# Allegro board Flatburn-sensor-board-PCB.brd
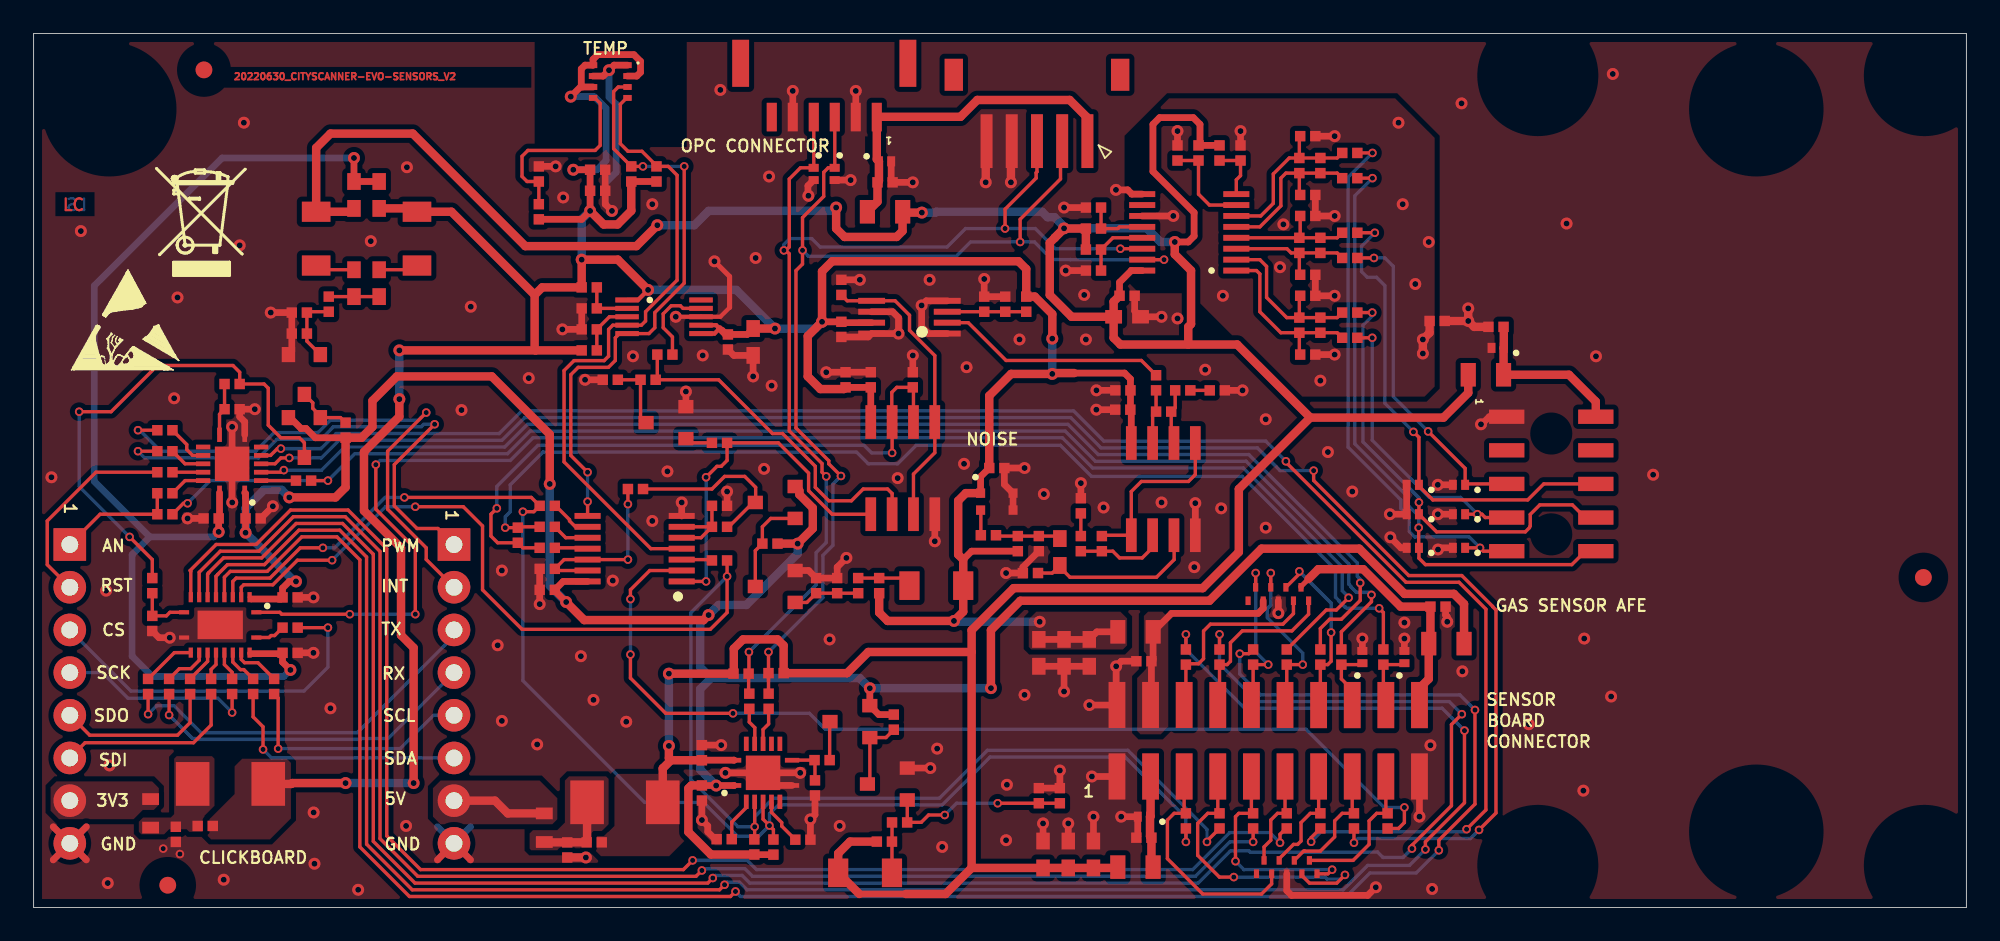
[diagram p0: board, top side]
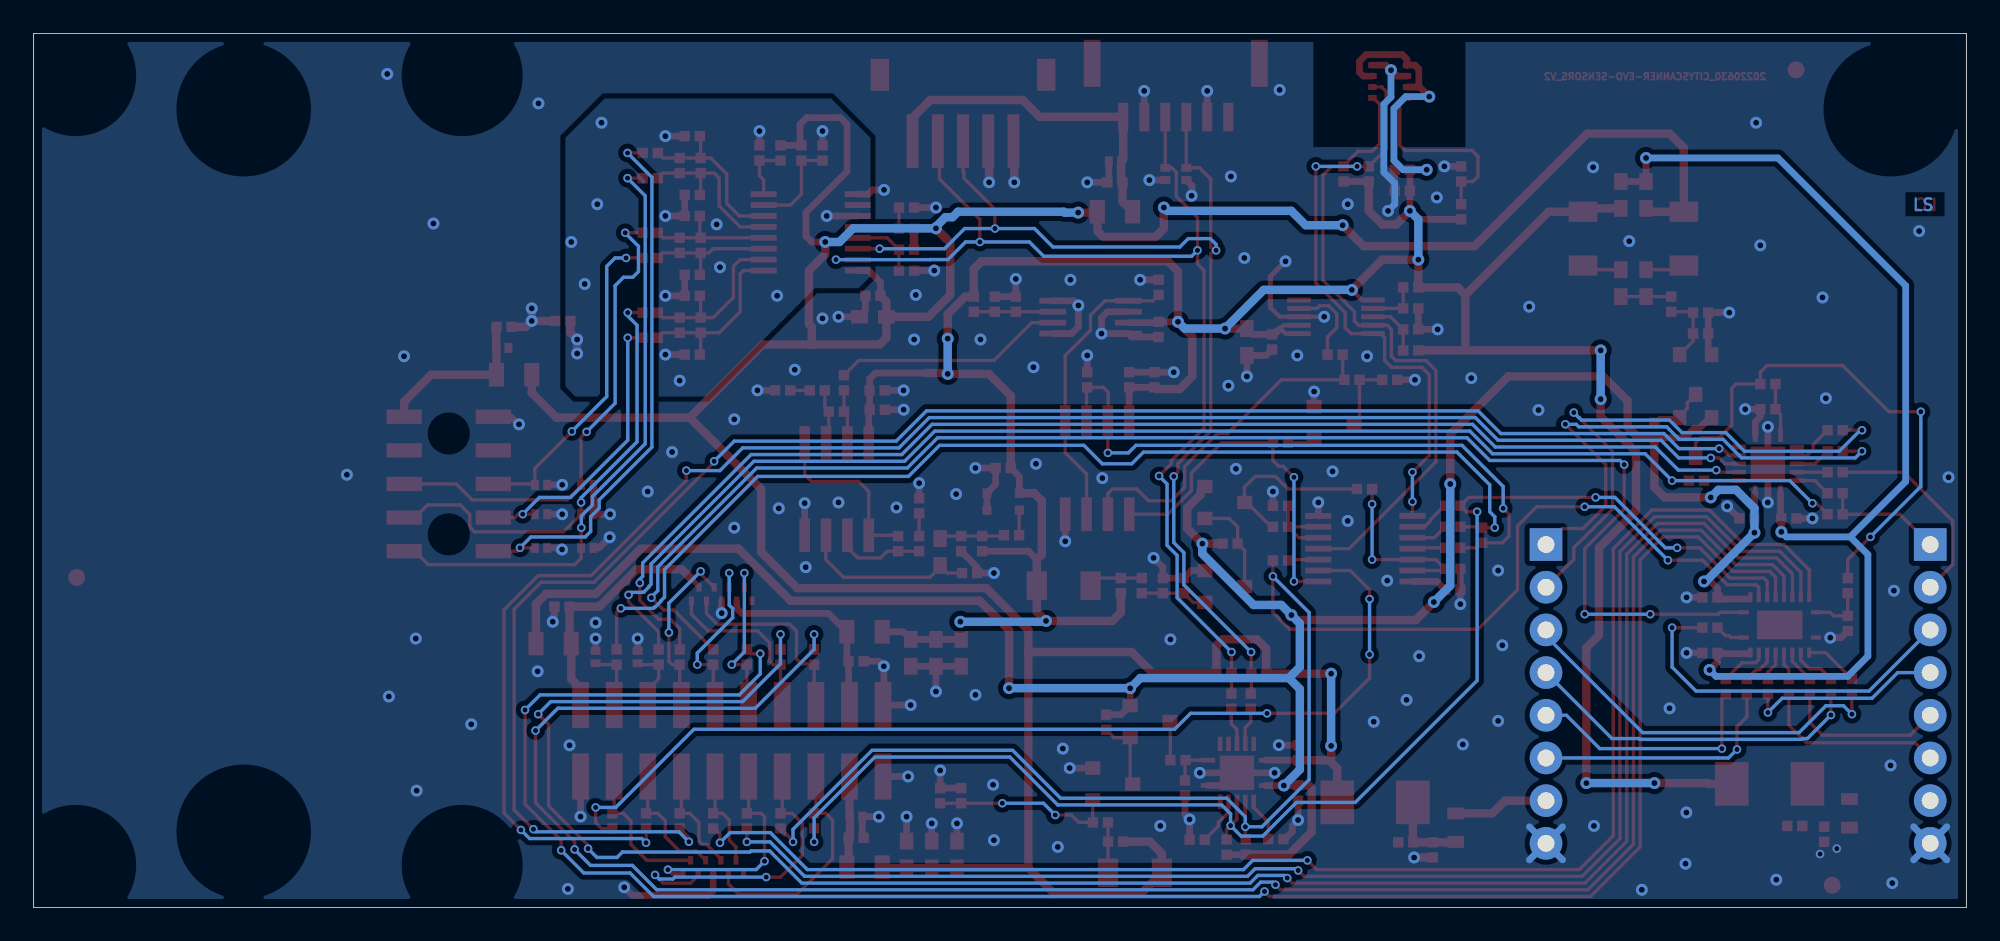
[diagram p1: board, bottom side, seen from below]

Outline 115 x 52 mm; copper layers: TOP, BOTTOM. Coordinates in mm from the lower left corner of the outline.
Outline path: 0,52 0,0 115,0 115,52 0,52

## Design rules (mm)
constraint set DEFAULT: 

## Placement (name value [footprint] x y rotation side)
C9  100n/50V  [CS-C-0402]  83.56 17.9 0 top
C10  100n/50V  [CS-C-0402]  66.06 14.65 180 top
C11  100n/50V  [CS-C-0402]  66.06 4.15 180 top
C14  NU  [CS-C-0402]  15.81 35.4 0 top
C15  100n/50V  [CS-C-0402]  15.26 18.45 0 top
C16  100n/50V  [CS-C-0402]  15.26 15.15 0 top
C17  100n/50V  [CS-C-0402]  13.06 23.15 0 top
C18  100n/50V  [CS-C-0402]  10.56 23.15 180 top
C19  100n/50V  [CS-C-0402]  8.46 4.35 90 top
C20  100n/50V  [CS-C-0402]  31.75 3.42 270 top
C21  10u/10V-X5R  [CS-C-0603]  62.81 15.15 270 top
C22  10u/10V-X5R  [CS-C-0603]  61.31 15.15 270 top
C23  10u/10V-X5R  [CS-C-0603]  59.81 15.15 270 top
C24  10u/10V-X5R  [CS-C-0603]  63.06 3.15 90 top
C25  10u/10V-X5R  [CS-C-0603]  61.56 3.15 90 top
C26  10u/10V-X5R  [CS-C-0603]  60.06 3.15 90 top
C27  100n/50V  [CS-C-0402]  39.76 6.81 270 top
C28  100n/50V  [CS-C-0402]  39.76 9.21 90 top
C99  100n/50V  [CS-C-0402]  30.56 18.9 180 top
C100  NU  [CS-C-0402]  61.06 6.65 270 top
C101  NU  [CS-C-0402]  47.81 19.15 270 top
C102  100n/50V  [CS-C-0402]  33.56 42.65 0 top
C103  100n/50V  [CS-C-0402]  33.56 43.9 0 top
C104  100n/50V  [CS-C-0402]  87.01 34.55 180 top
C105  100n/50V  [CS-C-0402]  65.06 36.4 0 top
C106  100n/50V  [CS-C-0402]  50.66 43.15 0 top
C107  10u/10V-X5R  [CS-C-0603]  65.06 35.15 0 top
C108  100n/50V  [CS-C-0402]  76.56 34.65 270 top
C109  100n/50V  [CS-C-0402]  76.56 39.4 270 top
C110  100n/50V  [CS-C-0402]  75.81 32.9 0 top
C111  100n/50V  [CS-C-0402]  76.56 44.15 270 top
C112  100n/50V  [CS-C-0402]  75.81 37.65 0 top
C113  100n/50V  [CS-C-0402]  75.81 36.4 0 top
C114  100n/50V  [CS-C-0402]  75.81 41.15 0 top
C115  100n/50V  [CS-C-0402]  75.81 42.4 0 top
C116  100n/50V  [CS-C-0402]  75.81 45.9 0 top
C117  100n/50V  [CS-C-0402]  57.31 26.15 0 top
C121  1u/16V-X5R  [CS-C-0402]  59.31 19.9 180 top
C122  1u/16V-X5R  [CS-C-0402]  56.81 22.15 0 top
C123  100n/50V  [CS-C-0402]  48.06 34.4 270 top
C124  100n/50V  [CS-C-0402]  48.06 36.9 90 top
C125  100n/50V  [CS-C-0402]  56.56 35.9 90 top
C126  100n/50V  [CS-C-0402]  64.8 29.62 180 top
C127  1u/16V-X5R  [CS-C-0402]  64.81 30.77 0 top
C128  100n/50V  [CS-C-0402]  62.31 23.9 90 top
C129  100n/50V  [CS-C-0402]  70.43 30.77 0 top
C130  100n/50V  [CS-C-0402]  49.81 31.4 90 top
C131  1u/16V-X5R  [CS-C-0402]  48.31 31.4 270 top
C132  100n/50V  [CS-C-0402]  52.31 31.4 90 top
C133  100n/50V  [CS-C-0402]  41.31 33.65 270 top
C134  10u/10V-X5R  [CS-C-0603]  42.81 33.65 270 top
DS5  NU  [SMA]  9.46 7.35 0 top
DS6  NU  [SMA]  32.93 6.25 0 top
DZ3  MMSZ5226BT1G  [SOD123]  16.81 41.4 270 top
DZ4  MMSZ5221BT1G  [SOD123]  22.81 41.4 270 top
DZ5  MMSZ5226BT1G  [SOD123]  47.87 2.06 0 top
DZ7  MMSZ5221BT1G  [SOD123]  55.31 19.15 180 top
F2  0ZCM0020FF2G  [FS-0603]  6.96 5.6 270 top
F3  0ZCM0020FF2G  [FS-0603]  30.39 4.74 90 top
FID1  TPS  [FIDUCIAL]  10.13 49.84 0 top
FID2  TPS  [FIDUCIAL]  7.98 1.32 0 top
FID3  TPS  [FIDUCIAL]  112.44 19.63 0 top
J7  878322014  [J-10X2-0200-MDS-878322014]  64.46 7.79 0 top
J9  STRIP 8P - FDT  [J-8-0254-FDT]  2.15 12.7 270 top
J10  STRIP 8P - FDT  [J-8-0254-FDT]  25.01 12.7 270 top
J11  BF100-10-A-D-1-0640-L-C  [J-5X2-0200-FDS-BF100]  90.3 25.2 270 top
J12  SM06B-GHS-TB  [J-6-0125-MOS-SM06B-GHS-TB]  50.17 47.03 180 top
J13  S5B-ZR-SM4A-TF  [J-5-0150-MOS-S5B-ZR-SM4A]  59.7 47.2 0 top
L3  BLM21PG221SN1D  [LS-0805]  84.06 15.7 180 top
L5  BLM21PG221SN1D  [LS-0805]  65.56 16.4 0 top
L6  BLM21PG221SN1D  [LS-0805]  65.56 2.4 180 top
L7  BLM21PG221SN1D  [LS-0805]  50.66 41.4 0 top
L8  BLM21PG221SN1D  [LS-0805]  86.41 31.7 0 top
NOREF  -  []  70.87 5.29 90 top
NOREF#2  -  []  42.88 3.15 90 top
NOREF#3  -  []  82.19 21.7 0 top
NOREF#4  -  []  68.87 5.29 90 top
NOREF#5  -  []  48.26 43.35 90 top
NOREF#6  -  []  37.06 43.2 90 top
NOREF#7  -  []  67.06 15.7 90 top
NOREF#8  -  []  46.18 7.87 0 top
NOREF#9  -  []  77.55 43.71 0 top
NOREF#10  -  []  69.62 45.04 90 top
NOREF#11  -  []  15.67 33.84 90 top
NOREF#12  -  []  59.06 35.45 90 top
NOREF#13  -  []  48.37 37.04 90 top
NOREF#14  -  []  77.55 38.96 0 top
NOREF#15  -  []  68.56 4.7 90 top
NOREF#16  -  []  67.61 31.08 0 top
NOREF#17  -  []  42.81 32.85 90 top
NOREF#18  -  []  29.89 5.24 0 top
NOREF#19  -  []  6.75 17.66 0 top
NOREF#20  -  []  15.36 34.15 0 top
NOREF#21  -  []  61.06 4.35 0 top
NOREF#22  -  []  62.31 14.75 0 top
NOREF#23  -  []  35.31 35.15 90 top
NOREF#24  -  []  21.06 41.2 90 top
NOREF#25  -  []  7.75 13.01 0 top
NOREF#26  -  []  12.75 13.01 0 top
NOREF#27  -  []  75.36 37.65 0 top
NOREF#28  -  []  15.3 25.71 0 top
NOREF#29  -  []  40.67 23.59 90 top
NOREF#30  -  []  76.25 15.66 0 top
NOREF#31  -  []  50.47 2.91 0 top
NOREF#32  -  []  64.61 36.4 0 top
NOREF#33  -  []  8.95 16.06 0 top
NOREF#34  -  []  29.75 43.51 0 top
NOREF#35  -  []  3 47.5 0 top
NOREF#36  -  []  45.81 43.35 0 top
NOREF#37  -  []  58.07 25.84 90 top
NOREF#38  -  []  47.06 43.35 0 top
NOREF#39  -  []  75.95 36.71 0 top
NOREF#40  -  []  49.81 23.4 0 top
NOREF#41  -  []  60.12 21.79 90 top
NOREF#42  -  []  83.01 15.7 0 top
NOREF#43  -  []  47.79 43.95 0 top
NOREF#44  -  []  62.61 40.4 0 top
NOREF#45  -  []  59.56 4.35 0 top
NOREF#46  -  []  58.86 19.9 0 top
NOREF#47  -  []  14.96 6.05 90 top
NOREF#48  -  []  7.05 27.46 0 top
NOREF#49  -  []  65.61 14.65 0 top
NOREF#50  -  []  76.56 34.2 90 top
NOREF#51  -  []  62.3 40.71 0 top
NOREF#52  -  []  39.76 6.36 90 top
NOREF#53  -  []  40.05 24.21 0 top
NOREF#54  -  []  40.05 20.96 0 top
NOREF#55  -  []  61.56 2.35 90 top
NOREF#56  -  []  15.66 30.13 90 top
NOREF#57  -  []  65.92 3.84 90 top
NOREF#58  -  []  36.11 31.4 0 top
NOREF#59  -  []  50.21 43.15 0 top
NOREF#60  -  []  65.92 14.34 90 top
NOREF#61  -  []  35.05 25.21 0 top
NOREF#62  -  []  30.42 21.09 90 top
NOREF#63  -  []  62.61 41.65 0 top
NOREF#64  -  []  12.12 12.39 90 top
NOREF#65  -  []  11.81 12.7 90 top
NOREF#66  -  []  65.31 22.15 0 top
NOREF#67  -  []  52.62 31.54 90 top
NOREF#68  -  []  42.89 12.41 90 top
NOREF#69  -  []  83.11 17.9 0 top
NOREF#70  -  []  77.86 44.9 0 top
NOREF#71  -  []  47.05 9.07 0 top
NOREF#72  -  []  61.56 19.95 90 top
NOREF#73  -  []  76.56 4.7 90 top
NOREF#74  -  []  20.06 42 0 top
NOREF#75  -  []  7.36 25.9 0 top
NOREF#76  -  [unnamed#2]  112.5 2.5 0 top
NOREF#77  -  []  59.81 6.2 90 top
NOREF#78  -  []  38.43 4.95 90 top
NOREF#79  -  []  78.56 4.7 90 top
NOREF#80  -  []  74.87 5.29 90 top
NOREF#81  -  []  52.16 40.7 90 top
NOREF#82  -  []  19.06 36.35 90 top
NOREF#83  -  []  15.95 35.71 0 top
NOREF#84  -  []  48.31 30.95 90 top
NOREF#85  -  []  43.36 21.65 0 top
NOREF#86  -  []  59.11 18.3 90 top
NOREF#87  -  []  44.32 14.25 0 top
NOREF#88  -  []  31.75 2.97 90 top
NOREF#89  -  []  80.62 15.04 90 top
NOREF#90  -  []  50.06 44.1 0 top
NOREF#91  -  []  65.3 4.46 0 top
NOREF#92  -  []  42.26 6.71 90 top
NOREF#93  -  []  9.8 23.46 0 top
NOREF#94  -  []  7.37 19.29 90 top
NOREF#95  -  []  49.06 34.32 0 top
NOREF#96  -  []  44.86 25.45 0 top
NOREF#97  -  []  71.56 37.9 90 top
NOREF#98  -  []  49.86 36.1 0 top
NOREF#99  -  []  74.87 15.04 90 top
NOREF#100  -  []  66.79 30.77 90 top
NOREF#101  -  []  76.87 33.89 90 top
NOREF#102  -  []  33.04 48 0 top
NOREF#103  -  []  43.42 13.03 0 top
NOREF#104  -  []  32.92 36.59 90 top
NOREF#105  -  []  14.71 29.55 0 top
NOREF#106  -  []  32.79 18.62 90 top
NOREF#107  -  []  74.25 15.66 0 top
NOREF#108  -  []  35.25 43.51 0 top
NOREF#109  -  []  115 0 90 top
NOREF#110  -  []  32.59 4.18 0 top
NOREF#111  -  []  87.24 33.6 0 top
NOREF#112  -  []  72.56 14.45 90 top
NOREF#113  -  []  60.81 15.55 90 top
NOREF#114  -  []  13.2 23.46 0 top
NOREF#115  -  []  70.56 4.7 90 top
NOREF#116  -  []  42.26 5.86 0 top
NOREF#117  -  []  76.57 45.59 90 top
NOREF#118  -  []  35.07 31.09 90 top
NOREF#119  -  []  62.56 1.95 90 top
NOREF#120  -  []  83.46 15 90 top
NOREF#121  -  []  64.26 35.15 0 top
NOREF#122  -  []  11.67 29.34 90 top
NOREF#123  -  []  63.06 2.35 90 top
NOREF#124  -  []  9.46 7.35 0 top
NOREF#125  -  []  112.5 -1.1 90 top
NOREF#126  -  []  72.25 5.91 0 top
NOREF#127  -  []  70.25 45.66 0 top
NOREF#128  -  []  17.25 36.66 0 top
NOREF#129  -  []  42.58 11.82 90 top
NOREF#130  -  []  51.98 6.39 90 top
NOREF#131  -  []  7.36 24.65 0 top
NOREF#132  -  []  42.49 23.7 90 top
NOREF#133  -  []  36.43 7.55 0 top
NOREF#134  -  []  33.7 42.96 0 top
NOREF#135  -  []  63.87 21.79 90 top
NOREF#136  -  []  112.5 48.2 90 top
NOREF#137  -  []  19.56 35.95 90 top
NOREF#138  -  []  76.87 15.04 90 top
NOREF#139  -  []  89.5 1.2 90 top
NOREF#140  -  []  112.5 1.2 90 top
NOREF#141  -  []  32.9 3.87 0 top
NOREF#142  -  []  7.36 28.4 0 top
NOREF#143  -  []  14.31 12.7 90 top
NOREF#144  -  []  15.4 18.76 0 top
NOREF#145  -  []  32.92 32.84 90 top
NOREF#146  -  []  67.92 30.77 0 top
NOREF#147  -  []  68 29.19 90 top
NOREF#148  -  []  13.82 22.84 90 top
NOREF#149  -  []  33.82 35.34 90 top
NOREF#150  -  []  65.96 42.45 0 top
NOREF#151  -  []  12.35 18.46 0 top
NOREF#152  -  []  82.75 35.21 0 top
NOREF#153  -  []  53.62 23.4 90 top
NOREF#154  -  []  15.16 32.9 0 top
NOREF#155  -  []  14.81 15.15 0 top
NOREF#156  -  []  14.62 12.39 90 top
NOREF#157  -  []  10.16 41.35 0 top
NOREF#158  -  []  84.21 24.85 0 top
NOREF#159  -  []  64.95 31.08 0 top
NOREF#160  -  []  16.11 26.78 0 top
NOREF#161  -  []  42.94 19.1 0 top
NOREF#162  -  []  75.95 41.46 0 top
NOREF#163  -  []  78.17 33.59 90 top
NOREF#164  -  []  62.92 38.84 90 top
NOREF#165  -  []  77.55 35.71 0 top
NOREF#166  -  []  74.56 4.7 90 top
NOREF#167  -  []  19.41 42.25 0 top
NOREF#168  -  []  80 15.66 0 top
NOREF#169  -  []  59.81 21.2 90 top
NOREF#170  -  []  29.8 21.71 0 top
NOREF#171  -  []  64.35 29.62 0 top
NOREF#172  -  []  42.27 13.03 0 top
NOREF#173  -  []  64.96 1.7 90 top
NOREF#174  -  []  76.57 32.59 90 top
NOREF#175  -  []  62.62 20.89 90 top
NOREF#176  -  []  47.5 19.01 0 top
NOREF#177  -  []  47.81 18.7 90 top
NOREF#178  -  []  62 21.51 0 top
NOREF#179  -  []  47.39 11.06 0 top
NOREF#180  -  []  40.67 22.34 90 top
NOREF#181  -  []  31.59 4.24 90 top
NOREF#182  -  []  84.94 21.7 0 top
NOREF#183  -  []  10.67 24.25 0 top
NOREF#184  -  []  76.57 36.09 90 top
NOREF#185  -  []  8.06 12.7 90 top
NOREF#186  -  []  41.23 4.37 0 top
NOREF#187  -  []  41.62 32.89 90 top
NOREF#188  -  []  40.07 6.05 90 top
NOREF#189  -  []  13.37 12.39 90 top
NOREF#190  -  []  85.41 21.1 90 top
NOREF#191  -  []  56.25 36.66 0 top
NOREF#192  -  []  76.56 43.7 90 top
NOREF#193  -  []  79.66 14.6 90 top
NOREF#194  -  []  77.86 38.65 0 top
NOREF#195  -  []  11.5 13.01 0 top
NOREF#196  -  []  112.5 45.9 90 top
NOREF#197  -  []  15.16 29.15 0 top
NOREF#198  -  []  7.36 23.4 0 top
NOREF#199  -  []  32.3 33.46 0 top
NOREF#200  -  []  83.7 18.21 0 top
NOREF#201  -  []  80.25 5.91 0 top
NOREF#202  -  []  17.87 36.04 90 top
NOREF#203  -  []  40.36 27.65 0 top
NOREF#204  -  []  32.61 35.65 0 top
NOREF#205  -  []  78.17 38.34 90 top
NOREF#206  -  []  38.32 32.59 90 top
NOREF#207  -  []  78.12 15.04 90 top
NOREF#208  -  []  44.86 20.45 0 top
NOREF#209  -  []  61.06 20.35 90 top
NOREF#210  -  []  49.81 30.95 90 top
NOREF#211  -  []  7.67 25.59 90 top
NOREF#212  -  []  67.38 29.81 0 top
NOREF#213  -  []  32.61 33.15 0 top
NOREF#214  -  []  87.65 21.2 90 top
NOREF#215  -  []  38.56 19.4 90 top
NOREF#216  -  []  85.41 24.85 90 top
NOREF#217  -  [unnamed#2]  89.5 2.5 0 top
NOREF#218  -  []  75.36 36.4 0 top
NOREF#219  -  []  72.87 5.29 90 top
NOREF#220  -  []  65.82 36.09 90 top
NOREF#221  -  []  62.62 24.04 90 top
NOREF#222  -  []  20.06 36.75 0 top
NOREF#223  -  []  50.77 5.36 0 top
NOREF#224  -  []  62.56 4.35 0 top
NOREF#225  -  []  29.75 41.26 0 top
NOREF#226  -  []  14.81 16.65 0 top
NOREF#227  -  []  45.63 3.72 90 top
NOREF#228  -  []  68.25 15.66 0 top
NOREF#229  -  []  46.46 8.77 0 top
NOREF#230  -  []  34.32 42.34 90 top
NOREF#231  -  []  25.41 42.25 0 top
NOREF#232  -  [unnamed#3]  102.5 47.5 0 top
NOREF#233  -  []  28.5 22.01 0 top
NOREF#234  -  []  8.16 5.1 90 top
NOREF#235  -  []  72.56 4.7 90 top
NOREF#236  -  []  51.26 44.1 90 top
NOREF#237  -  []  62.31 21.2 90 top
NOREF#238  -  []  77.81 14.45 90 top
NOREF#239  -  []  76.56 38.95 90 top
NOREF#240  -  []  84.94 25.45 0 top
NOREF#241  -  []  7.06 16.45 90 top
NOREF#242  -  []  15.61 25.4 0 top
NOREF#243  -  []  11.05 29.96 0 top
NOREF#244  -  []  62 24.66 0 top
NOREF#245  -  []  62.61 39.15 0 top
NOREF#246  -  []  34.32 43.59 90 top
NOREF#247  -  []  30.11 22.65 0 top
NOREF#248  -  []  50.12 31.54 90 top
NOREF#249  -  []  62.81 14.35 90 top
NOREF#250  -  []  41.85 3.75 90 top
NOREF#251  -  []  80.31 14.45 90 top
NOREF#252  -  []  30.7 24.21 0 top
NOREF#253  -  []  11.36 29.65 0 top
NOREF#254  -  []  75.62 44.29 90 top
NOREF#255  -  []  65.46 5.1 0 top
NOREF#256  -  []  64.51 16.4 0 top
NOREF#257  -  []  39.76 8.76 90 top
NOREF#258  -  []  6.46 6.1 0 top
NOREF#259  -  []  10.11 23.15 0 top
NOREF#260  -  []  37.7 33.21 0 top
NOREF#261  -  []  56.86 26.15 0 top
NOREF#262  -  []  72.25 15.66 0 top
NOREF#263  -  []  86.87 34.24 90 top
NOREF#264  -  []  75.95 46.21 0 top
NOREF#265  -  []  64.36 30.77 0 top
NOREF#266  -  []  44.43 6.98 90 top
NOREF#267  -  []  64.66 29.31 90 top
NOREF#268  -  []  56.36 22.15 0 top
NOREF#269  -  []  39.45 9.97 0 top
NOREF#270  -  []  31.44 3.28 0 top
NOREF#271  -  []  39.45 6.67 0 top
NOREF#272  -  []  80.56 4.7 90 top
NOREF#273  -  []  50.31 18.7 90 top
NOREF#274  -  []  10.25 18.16 0 top
NOREF#275  -  []  33.82 34.09 90 top
NOREF#276  -  []  65.61 4.15 0 top
NOREF#277  -  []  64.06 1.7 0 top
NOREF#278  -  []  68.06 44.45 90 top
NOREF#279  -  []  19.56 41.2 90 top
NOREF#280  -  []  16.02 14.84 90 top
NOREF#281  -  []  75.95 37.96 0 top
NOREF#282  -  []  84.32 17.59 90 top
NOREF#283  -  []  30.11 18.9 0 top
NOREF#284  -  []  9.31 12.7 90 top
NOREF#285  -  []  57.45 26.46 0 top
NOREF#286  -  []  57.57 21.84 90 top
NOREF#287  -  []  43.71 3.45 0 top
NOREF#288  -  []  85.36 31.7 0 top
NOREF#289  -  []  70.56 14.45 90 top
NOREF#290  -  [unnamed#3]  102.5 4.5 0 top
NOREF#291  -  []  87.91 31 90 top
NOREF#292  -  []  76.87 5.29 90 top
NOREF#293  -  []  63.2 38.21 0 top
NOREF#294  -  []  35.36 24.9 0 top
NOREF#295  -  []  38.81 27.9 90 top
NOREF#296  -  []  14.71 33.3 0 top
NOREF#297  -  []  7.67 23.09 90 top
NOREF#298  -  []  70.56 44.45 90 top
NOREF#299  -  []  35.67 24.59 90 top
NOREF#300  -  []  41.95 13.6 90 top
NOREF#301  -  []  7.67 26.84 90 top
NOREF#302  -  []  12.56 24.67 90 top
NOREF#303  -  []  46.94 10.66 90 top
NOREF#304  -  []  18.87 27.64 90 top
NOREF#305  -  []  78.17 43.09 90 top
NOREF#306  -  []  44.57 21.34 90 top
NOREF#307  -  []  31.32 23.59 90 top
NOREF#308  -  []  76.25 34.51 0 top
NOREF#309  -  []  87.22 26.15 0 top
NOREF#310  -  []  58.12 35.14 90 top
NOREF#311  -  []  71.39 41.67 0 top
NOREF#312  -  []  9.15 18.69 0 top
NOREF#313  -  []  32.93 6.25 0 top
NOREF#314  -  []  50.48 3.6 90 top
NOREF#315  -  []  30.11 21.4 0 top
NOREF#316  -  []  57.81 35.45 90 top
NOREF#317  -  []  33.54 48 0 top
NOREF#318  -  []  58.55 20.21 0 top
NOREF#319  -  []  59.56 1.95 90 top
NOREF#320  -  []  65.79 37.12 90 top
NOREF#321  -  []  66.48 31.98 0 top
NOREF#322  -  []  12.95 25.1 90 top
NOREF#323  -  []  86.51 33 0 top
NOREF#324  -  []  32.3 37.21 0 top
NOREF#325  -  []  49.37 19.29 90 top
NOREF#326  -  []  49.61 7.34 0 top
NOREF#327  -  []  29.8 19.21 0 top
NOREF#328  -  []  18.56 42 0 top
NOREF#329  -  []  59.31 15.55 90 top
NOREF#330  -  []  47.67 8.46 90 top
NOREF#331  -  []  68.37 44.14 90 top
NOREF#332  -  []  79.19 15.2 0 top
NOREF#333  -  []  75.36 32.9 0 top
NOREF#334  -  []  52.11 19.15 0 top
NOREF#335  -  []  58.56 21.2 90 top
NOREF#336  -  []  8.46 3.9 90 top
NOREF#337  -  []  20.56 36.35 90 top
NOREF#338  -  []  8.15 5.11 0 top
NOREF#339  -  []  89.5 -1.1 90 top
NOREF#340  -  []  51.18 10.57 90 top
NOREF#341  -  []  75 35.41 0 top
NOREF#342  -  []  15.4 15.46 0 top
NOREF#343  -  []  51.26 40.7 0 top
NOREF#344  -  []  76.56 14.45 90 top
NOREF#345  -  []  50.8 43.46 0 top
NOREF#346  -  []  28.81 21.7 90 top
NOREF#347  -  []  68.87 15.04 90 top
NOREF#348  -  []  47.75 34.26 0 top
NOREF#349  -  []  59.31 14.75 0 top
NOREF#350  -  []  16.02 18.14 90 top
NOREF#351  -  []  72.87 15.04 90 top
NOREF#352  -  []  15.4 16.96 0 top
NOREF#353  -  []  63.82 37.59 90 top
NOREF#354  -  []  66.79 29.5 0 top
NOREF#355  -  []  77.86 43.4 0 top
NOREF#356  -  []  45.01 4.34 0 top
NOREF#357  -  []  30.11 20.15 0 top
NOREF#358  -  []  29.8 22.96 0 top
NOREF#359  -  []  37.11 32.9 0 top
NOREF#360  -  []  59.5 7.41 0 top
NOREF#361  -  []  33.21 3.56 90 top
NOREF#362  -  []  71.81 44.45 90 top
NOREF#363  -  []  6.75 19.91 0 top
NOREF#364  -  []  75.31 34.2 90 top
NOREF#365  -  []  70.87 45.04 90 top
NOREF#366  -  []  9 13.01 0 top
NOREF#367  -  []  62.31 15.55 90 top
NOREF#368  -  []  58.25 21.51 0 top
NOREF#369  -  []  67.1 31.36 90 top
NOREF#370  -  []  82.19 23.7 0 top
NOREF#371  -  []  81.46 21.1 0 top
NOREF#372  -  []  63.56 21.2 90 top
NOREF#373  -  []  40.36 23.9 0 top
NOREF#374  -  []  43.19 2.84 90 top
NOREF#375  -  []  61.06 6.2 90 top
NOREF#376  -  []  80.87 5.29 90 top
NOREF#377  -  []  69.44 21.15 90 top
NOREF#378  -  []  51.49 11.16 90 top
NOREF#379  -  []  52.31 30.95 90 top
NOREF#380  -  []  81.46 23.1 0 top
NOREF#381  -  []  51.67 1.21 90 top
NOREF#382  -  []  29.12 21.39 90 top
NOREF#383  -  []  89.5 48.2 90 top
NOREF#384  -  []  41.31 33.2 90 top
NOREF#385  -  []  68.25 5.91 0 top
NOREF#386  -  []  8.95 16.06 90 top
NOREF#387  -  []  30.11 23.9 0 top
NOREF#388  -  []  30.06 40.95 90 top
NOREF#389  -  []  10.42 22.84 90 top
NOREF#390  -  []  47.01 43.35 90 top
NOREF#391  -  []  59.81 14.35 90 top
NOREF#392  -  []  33.2 34.71 0 top
NOREF#393  -  []  40.64 4.06 0 top
NOREF#394  -  []  76.57 40.84 90 top
NOREF#395  -  []  75.62 34.79 90 top
NOREF#396  -  []  7.05 24.96 0 top
NOREF#397  -  []  64.51 2.4 0 top
NOREF#398  -  []  33.06 48 90 top
NOREF#399  -  []  33.11 42.65 0 top
NOREF#400  -  []  40.36 22.65 0 top
NOREF#401  -  []  58.87 20.89 90 top
NOREF#402  -  []  33.7 44.21 0 top
NOREF#403  -  []  63.2 41.96 0 top
NOREF#404  -  []  5.76 34.3 0 top
NOREF#405  -  []  7.06 18.7 90 top
NOREF#406  -  []  13.06 12.7 90 top
NOREF#407  -  []  32.06 2.66 90 top
NOREF#408  -  []  76.57 42.09 90 top
NOREF#409  -  []  13.54 26.9 90 top
NOREF#410  -  []  48.75 19.91 0 top
NOREF#411  -  []  54.36 34.15 90 top
NOREF#412  -  []  20.61 40.55 90 top
NOREF#413  -  []  66.19 5.7 0 top
NOREF#414  -  []  16.57 35.09 90 top
NOREF#415  -  []  75.31 43.7 90 top
NOREF#416  -  []  15.66 26.38 90 top
NOREF#417  -  []  82.19 25.45 0 top
NOREF#418  -  []  81.69 15.2 0 top
NOREF#419  -  []  44.02 3.14 90 top
NOREF#420  -  []  46.49 6.66 90 top
NOREF#421  -  []  60.75 6.51 0 top
NOREF#422  -  []  49.76 10.11 90 top
NOREF#423  -  []  76.25 44.01 0 top
NOREF#424  -  []  35.87 42.89 90 top
NOREF#425  -  []  56.56 35.45 90 top
NOREF#426  -  []  75.62 39.54 90 top
NOREF#427  -  []  9.15 16.44 90 top
NOREF#428  -  []  62.92 40.09 90 top
NOREF#429  -  []  67.53 21.15 0 top
NOREF#430  -  []  74.25 5.91 0 top
NOREF#431  -  []  82.66 23.1 90 top
NOREF#432  -  []  48.12 18.39 90 top
NOREF#433  -  []  69.12 22.15 90 top
NOREF#434  -  []  51.53 8.69 0 top
NOREF#435  -  []  77.5 15.66 0 top
NOREF#436  -  []  62.31 23.45 90 top
NOREF#437  -  []  2.15 19.05 90 top
NOREF#438  -  []  46.54 43.95 0 top
NOREF#439  -  []  37.32 31.09 90 top
NOREF#440  -  []  61.31 14.35 90 top
NOREF#441  -  []  18.56 36.75 0 top
NOREF#442  -  []  40.05 22.96 0 top
NOREF#443  -  []  77.55 45.21 0 top
NOREF#444  -  []  69 45.66 0 top
NOREF#445  -  []  8.77 4.49 90 top
NOREF#446  -  []  12.61 23.15 0 top
NOREF#447  -  []  83.37 34.59 90 top
NOREF#448  -  []  33.29 49.47 90 top
NOREF#449  -  []  41.33 14.22 0 top
NOREF#450  -  []  82.66 21.1 90 top
NOREF#451  -  []  0 52 0 top
NOREF#452  -  []  11.36 31.15 0 top
NOREF#453  -  []  78.17 39.84 90 top
NOREF#454  -  []  17.56 35.45 90 top
NOREF#455  -  []  76.87 43.39 90 top
NOREF#456  -  []  36.44 28.85 0 top
NOREF#457  -  []  78.87 5.29 90 top
NOREF#458  -  []  49.06 18.7 90 top
NOREF#459  -  []  51.08 5.05 0 top
NOREF#460  -  []  82.16 14.6 90 top
NOREF#461  -  []  38.39 22.6 0 top
NOREF#462  -  []  67.75 44.76 0 top
NOREF#463  -  []  30.42 22.34 90 top
NOREF#464  -  []  6.81 12.7 90 top
NOREF#465  -  []  10.56 12.7 90 top
NOREF#466  -  []  84.21 23.1 0 top
NOREF#467  -  []  7.67 24.34 90 top
NOREF#468  -  []  65.2 36.71 0 top
NOREF#469  -  []  21.06 35.95 90 top
NOREF#470  -  []  61.37 5.89 90 top
NOREF#471  -  []  7.37 17.04 90 top
NOREF#472  -  []  42.31 33.25 0 top
NOREF#473  -  []  12.84 25.37 90 top
NOREF#474  -  []  19.06 41.6 90 top
NOREF#475  -  []  34.61 36.3 0 top
NOREF#476  -  []  75.95 42.71 0 top
NOREF#477  -  []  75.95 33.21 0 top
NOREF#478  -  []  45.31 23.15 90 top
NOREF#479  -  []  62.3 39.46 0 top
NOREF#480  -  []  65.36 35.55 0 top
NOREF#481  -  []  51.39 4.74 90 top
NOREF#482  -  []  33.11 43.9 0 top
NOREF#483  -  []  70.25 15.66 0 top
NOREF#484  -  []  -67.07 -104.54 0 top
NOREF#485  -  []  41.57 27.34 90 top
NOREF#486  -  []  49.86 4.22 0 top
NOREF#487  -  []  49.16 6.94 90 top
NOREF#488  -  []  35.31 34.15 0 top
NOREF#489  -  []  77.86 33.9 0 top
NOREF#490  -  []  49.61 41.4 0 top
NOREF#491  -  []  32.96 23.3 0 top
NOREF#492  -  []  43.95 21.96 0 top
NOREF#493  -  []  86.25 34.86 0 top
NOREF#494  -  []  30.37 40.64 90 top
NOREF#495  -  []  32.61 34.4 0 top
NOREF#496  -  []  77.55 34.21 0 top
NOREF#497  -  []  30.06 43.2 90 top
NOREF#498  -  []  89.5 45.9 90 top
NOREF#499  -  []  63.25 22.41 0 top
NOREF#500  -  []  30.7 20.46 0 top
NOREF#501  -  []  18.56 27.95 90 top
NOREF#502  -  []  45.32 4.03 0 top
NOREF#503  -  []  60.81 14.75 0 top
NOREF#504  -  []  41 33.51 0 top
NOREF#505  -  []  49.31 12.41 0 top
NOREF#506  -  []  42.31 34.05 90 top
NOREF#507  -  []  15.05 34.46 0 top
NOREF#508  -  []  8.37 12.39 90 top
NOREF#509  -  []  14.81 18.45 0 top
NOREF#510  -  []  14 13.01 0 top
NOREF#511  -  []  48 31.26 0 top
NOREF#512  -  [unnamed#2]  89.5 49.5 0 top
NOREF#513  -  []  26.61 40.55 90 top
NOREF#514  -  []  78.46 14.6 0 top
NOREF#515  -  []  75 44.91 0 top
NOREF#516  -  [unnamed#2]  112.5 49.5 0 top
NOREF#517  -  []  46.87 19.29 90 top
NOREF#518  -  []  16.11 30.53 0 top
NOREF#519  -  []  44.33 2.83 90 top
NOREF#520  -  []  22.81 38.2 90 top
NOREF#521  -  []  7.05 23.71 0 top
NOREF#522  -  []  76.57 37.34 90 top
NOREF#523  -  []  7.05 26.21 0 top
NOREF#524  -  []  7.67 28.09 90 top
NOREF#525  -  []  48.37 33.64 90 top
NOREF#526  -  []  42.57 3.46 0 top
NOREF#527  -  []  16.81 38.2 90 top
NOREF#528  -  []  18.25 28.26 0 top
NOREF#529  -  []  7.05 28.71 0 top
NOREF#530  -  []  35.99 28.45 90 top
NOREF#531  -  []  40.67 20.34 90 top
NOREF#532  -  []  75.31 38.95 90 top
NOREF#533  -  []  44.54 6.71 90 top
NOREF#534  -  []  47.87 2.06 0 top
NOREF#535  -  []  84.21 21.1 0 top
NOREF#536  -  []  75.36 42.4 0 top
NOREF#537  -  []  59.37 36.04 90 top
NOREF#538  -  []  87.01 31 0 top
NOREF#539  -  []  68.23 30.46 90 top
NOREF#540  -  []  82.56 15 0 top
NOREF#541  -  []  82.66 24.85 90 top
NOREF#542  -  []  34.61 34 90 top
NOREF#543  -  []  45.13 7.26 90 top
NOREF#544  -  []  10.79 27.42 0 top
NOREF#545  -  []  87.71 33 90 top
NOREF#546  -  []  61.06 1.95 90 top
NOREF#547  -  []  69.31 44.45 90 top
NOREF#548  -  []  77.55 40.46 0 top
NOREF#549  -  []  11.06 28.12 0 top
NOREF#550  -  []  48.62 30.64 90 top
NOREF#551  -  []  43.73 13.94 0 top
NOREF#552  -  []  81.46 24.85 0 top
NOREF#553  -  []  33.4 12.7 0 top
NOREF#554  -  []  12.57 30.84 90 top
NOREF#555  -  []  75.36 41.15 0 top
NOREF#556  -  []  47.75 37.66 0 top
NOREF#557  -  []  50.79 44.7 0 top
NOREF#558  -  []  11.95 15.46 90 top
NOREF#559  -  []  20.56 41.6 90 top
NOREF#560  -  []  45.31 18.15 90 top
NOREF#561  -  []  30.42 18.59 90 top
NOREF#562  -  []  33.86 31.4 0 top
NOREF#563  -  []  52.03 22.4 0 top
NOREF#564  -  []  10.54 12.7 0 top
NOREF#565  -  []  30.37 42.89 90 top
NOREF#566  -  []  40.07 9.35 90 top
NOREF#567  -  []  16.02 16.34 90 top
NOREF#568  -  []  36.75 43.51 0 top
NOREF#569  -  []  46.56 18.7 90 top
NOREF#570  -  []  57.5 35.76 0 top
NOREF#571  -  []  43.73 11.82 90 top
NOREF#572  -  []  48.06 36.45 90 top
NOREF#573  -  []  58.75 36.66 0 top
NOREF#574  -  []  53.94 22.4 90 top
NOREF#575  -  []  52 32.16 0 top
NOREF#576  -  []  42.38 9.03 0 top
NOREF#577  -  []  57.91 20 0 top
NOREF#578  -  []  35.56 43.2 90 top
NOREF#579  -  []  43.9 6.28 0 top
NOREF#580  -  []  40.36 20.65 0 top
NOREF#581  -  []  9.66 27.29 0 top
NOREF#582  -  []  78.25 5.91 0 top
NOREF#583  -  []  50.87 11.78 0 top
NOREF#584  -  []  41.64 13.91 0 top
NOREF#585  -  []  70.57 31.08 0 top
NOREF#586  -  []  63.76 34.75 90 top
NOREF#587  -  []  5.76 5.1 0 top
NOREF#588  -  []  70.25 5.91 0 top
NOREF#589  -  []  76.87 38.64 90 top
NOREF#590  -  []  64.04 29.93 0 top
NOREF#591  -  []  77.86 35.4 0 top
NOREF#592  -  []  59.5 22.41 0 top
NOREF#593  -  []  74.56 14.45 90 top
NOREF#594  -  []  56.87 36.04 90 top
NOREF#595  -  []  66.16 15.7 0 top
NOREF#596  -  []  10.07 4.54 90 top
NOREF#597  -  []  44.94 13.63 90 top
NOREF#598  -  []  80.96 14.6 0 top
NOREF#599  -  []  46.8 7.25 90 top
NOREF#600  -  []  15.92 25.09 90 top
NOREF#601  -  []  60.12 6.79 90 top
NOREF#602  -  []  46.25 19.91 0 top
NOREF#603  -  []  75 40.16 0 top
NOREF#604  -  []  44.04 12.41 90 top
NOREF#605  -  []  12.96 8.65 0 top
NOREF#606  -  []  65.3 14.96 0 top
NOREF#607  -  []  10.87 12.39 90 top
NOREF#608  -  []  49.5 32.16 0 top
NOREF#609  -  []  50.17 3.91 0 top
NOREF#610  -  []  7.12 12.39 90 top
NOREF#611  -  []  9.35 15.16 90 top
NOREF#612  -  []  84.94 23.7 0 top
NOREF#613  -  []  32.61 36.9 0 top
NOREF#614  -  []  78.17 35.09 90 top
NOREF#615  -  []  66.66 5.1 90 top
NOREF#616  -  []  34.45 31.71 0 top
NOREF#617  -  []  78.17 44.59 90 top
NOREF#618  -  []  25.01 19.05 90 top
NOREF#619  -  []  60.56 20.75 0 top
NOREF#620  -  []  63.82 41.34 90 top
NOREF#621  -  []  6.5 13.01 0 top
NOREF#622  -  []  62.61 37.9 0 top
NOREF#623  -  []  29.19 4.24 0 top
NOREF#624  -  []  36.7 31.71 0 top
NOREF#625  -  [unnamed#3]  4.5 47.5 0 top
NOREF#626  -  []  50 19.01 0 top
NOREF#627  -  []  15.36 35.4 0 top
NOREF#628  -  []  70.87 15.04 90 top
NOREF#629  -  []  71.19 30.46 90 top
NOREF#630  -  []  83.06 34.9 0 top
NOREF#631  -  []  77.86 40.15 0 top
NOREF#632  -  []  9.76 4.85 0 top
NOREF#633  -  []  65.57 30.46 90 top
NOREF#634  -  []  59.17 19.59 90 top
NOREF#635  -  []  51.42 42.84 90 top
NOREF#636  -  []  76.25 39.26 0 top
NOREF#637  -  []  86.56 34.55 0 top
NOREF#638  -  []  93.38 20.15 90 top
NOREF#639  -  []  41.25 8.9 0 top
NOREF#640  -  []  40.95 27.96 0 top
NOREF#641  -  []  31.32 19.84 90 top
NOREF#642  -  []  76.25 5.91 0 top
NOREF#643  -  []  68.56 14.45 90 top
NOREF#644  -  []  9.45 5.16 0 top
NOREF#645  -  []  75.36 45.9 0 top
NOREF#646  -  []  50.66 33.97 90 top
NOREF#647  -  []  50.62 18.39 90 top
NOREF#648  -  []  11.95 31.46 0 top
NOREF#649  -  []  42.49 18.7 90 top
NOREF#650  -  []  9.62 12.39 90 top
NOREF#651  -  []  7.36 27.15 0 top
NOREF#652  -  []  71.5 44.76 0 top
NOREF#653  -  []  85.41 23.1 90 top
NOREF#654  -  []  60.06 2.35 90 top
NOREF#655  -  []  69.98 30.77 0 top
NOREF#656  -  []  33.2 35.96 0 top
NOREF#657  -  []  72.12 44.14 90 top
NOREF#658  -  []  38.36 30.2 0 top
NOREF#659  -  []  42.94 24.1 0 top
NOREF#660  -  []  56.95 22.46 0 top
NOREF#661  -  []  48.06 33.95 90 top
NOREF#662  -  []  37.37 42.89 90 top
NOREF#663  -  []  10.25 13.01 0 top
Q11  BSS84  [SOT23]  17.06 29.15 90 top
Q12  BC817-25  [SOT23]  17.06 32.9 90 top
Q24  BSS84  [SOT23]  49.76 10.11 0 top
Q25  BC817-25  [SOT23]  51.98 6.39 0 top
Q26  BSS84  [SOT23]  45.31 23.15 0 top
Q27  BC817-25  [SOT23]  45.31 18.15 0 top
Q28  BSS138  [SOT23]  38.81 27.9 0 top
R18  33R  [RS-0402]  80.56 5.15 90 top
R19  33R  [RS-0402]  78.56 5.15 90 top
R20  33R  [RS-0402]  76.56 14.9 90 top
R21  33R  [RS-0402]  76.56 5.15 90 top
R22  33R  [RS-0402]  74.56 14.9 90 top
R23  33R  [RS-0402]  74.56 5.15 90 top
R24  33R  [RS-0402]  72.56 14.9 90 top
R25  33R  [RS-0402]  72.56 5.15 90 top
R26  33R  [RS-0402]  70.56 14.9 90 top
R27  33R  [RS-0402]  70.56 5.15 90 top
R28  33R  [RS-0402]  68.56 14.9 90 top
R29  33R  [RS-0402]  68.56 5.15 90 top
R32  33R  [RS-0402]  15.26 16.65 0 top
R33  NU  [RS-0603]  19.06 42.4 270 top
R34  0R  [RS-0603]  20.56 42.4 270 top
R35  0R  [RS-0402]  7.81 23.4 180 top
R36  33R  [RS-0402]  14.31 13.15 270 top
R37  100k  [RS-0402]  18.56 28.4 270 top
R38  NU  [RS-0402]  16.06 25.4 180 top
R39  NU  [RS-0402]  7.81 24.65 180 top
R40  33R  [RS-0402]  13.06 13.15 270 top
R41  33R  [RS-0402]  7.81 25.9 180 top
R42  33R  [RS-0402]  11.81 13.15 270 top
R43  33R  [RS-0402]  7.81 27.15 180 top
R44  33R  [RS-0402]  10.56 13.15 270 top
R45  33R  [RS-0402]  7.81 28.4 180 top
R46  33R  [RS-0402]  9.31 13.15 270 top
R47  33R  [RS-0402]  8.06 13.15 270 top
R48  0R  [RS-0603]  20.56 37.15 270 top
R49  NU  [RS-0603]  19.06 37.15 270 top
R50  33R  [RS-0402]  6.81 13.15 270 top
R51  1k  [RS-0402]  17.56 35.9 90 top
R53  100R  [RS-0402]  11.81 31.15 0 top
R54  100R  [RS-0402]  7.06 19.15 90 top
R57  100k  [RS-0402]  15.81 34.15 180 top
R59  10k  [RS-0402]  7.06 16.9 90 top
R60  10k  [RS-0402]  11.81 29.65 180 top
R61  0R  [RS-0402]  10.21 4.85 180 top
R62  0R  [RS-0402]  33.35 3.87 180 top
R96  33R  [RS-0402]  77.81 14.9 90 top
R97  33R  [RS-0402]  80.31 14.9 90 top
R101  33R  [RS-0402]  42.58 12.27 90 top
R102  33R  [RS-0402]  43.73 12.27 90 top
R105  100R  [RS-0402]  46.91 8.77 0 top
R106  10k  [RS-0402]  46.49 7.11 90 top
R225  100R  [RS-0402]  35.81 24.9 180 top
R226  33R  [RS-0402]  40.81 20.65 180 top
R228  NU  [RS-0402]  50.62 3.91 180 top
R230  100R  [RS-0402]  40.81 22.65 180 top
R231  33R  [RS-0402]  30.56 23.9 0 top
R232  100k  [RS-0402]  51.18 11.02 90 top
R233  10k  [RS-0402]  40.81 23.9 180 top
R234  1k  [RS-0402]  51.53 5.05 180 top
R235  10k  [RS-0402]  30.56 20.15 0 top
R236  100k  [RS-0402]  59.81 6.65 90 top
R237  10k  [RS-0402]  41.09 4.06 0 top
R238  10k  [RS-0402]  45.77 4.03 180 top
R239  100k  [RS-0402]  42.88 3.6 270 top
R240  100k  [RS-0402]  44.02 3.59 270 top
R241  100k  [RS-0402]  42.09 13.91 180 top
R242  100k  [RS-0402]  44.18 13.94 0 top
R243  NU  [RS-0402]  50.31 19.15 270 top
R244  100k  [RS-0402]  43.81 21.65 0 top
R245  1k  [RS-0402]  49.06 19.15 90 top
R246  100k  [RS-0402]  46.56 19.15 90 top
R247  10k  [RS-0402]  30.06 43.65 270 top
R248  NU  [RS-0402]  30.06 41.4 270 top
R249  0R  [RS-0402]  83.51 34.9 180 top
R250  NU  [RS-0402]  63.06 40.4 180 top
R251  NU  [RS-0402]  63.06 39.15 180 top
R252  10k  [RS-0402]  63.06 41.65 0 top
R253  10k  [RS-0402]  63.06 37.9 0 top
R254  5.1k  [RS-0402]  78.31 33.9 180 top
R255  5.1k  [RS-0402]  78.31 35.4 180 top
R256  10k  [RS-0402]  75.31 34.65 90 top
R257  10k  [RS-0402]  75.31 39.4 90 top
R258  10k  [RS-0402]  75.31 44.15 90 top
R259  5.1k  [RS-0402]  78.31 38.65 180 top
R260  5.1k  [RS-0402]  78.31 40.15 180 top
R261  5.1k  [RS-0402]  78.31 43.4 180 top
R262  5.1k  [RS-0402]  78.31 44.9 180 top
R263  10k  [RS-0402]  69.31 44.9 90 top
R264  10k  [RS-0402]  68.06 44.9 270 top
R265  10k  [RS-0402]  71.81 44.9 270 top
R266  10k  [RS-0402]  70.56 44.9 90 top
R267  1M  [RS-0402]  58.56 21.65 270 top
R268  1M  [RS-0402]  59.81 21.65 90 top
R269  390R  [RS-0603]  61.06 21.15 270 top
R270  100k  [RS-0402]  59.06 35.9 90 top
R271  100k  [RS-0402]  57.81 35.9 270 top
R272  10k  [RS-0402]  62.31 21.65 270 top
R273  120k  [RS-0402]  63.56 21.65 90 top
R274  10k  [RS-0402]  68.37 30.77 180 top
R275  120k  [RS-0402]  67.24 29.5 0 top
R276  100k  [RS-0402]  66.79 31.22 90 top
R277  NU  [RS-0402]  33.06 33.15 180 top
R278  10k  [RS-0402]  33.06 34.4 0 top
R280  100R  [RS-0402]  40.81 27.65 0 top
R281  10k  [RS-0402]  34.31 31.4 0 top
R282  1k  [RS-0402]  36.56 31.4 0 top
R283  2.2k  [RS-0402]  37.56 32.9 0 top
R284  10k  [RS-0402]  33.06 35.65 0 top
R285  NU  [RS-0402]  33.06 36.9 180 top
R286  NU  [RS-0402]  30.56 21.4 180 top
R287  NU  [RS-0402]  30.56 22.65 180 top
R288  0R  [RS-0402]  28.81 22.15 270 top
R289  100k  [RS-0402]  35.56 43.65 270 top
R290  100k  [RS-0402]  37.06 43.65 270 top
TVS7  D3V3F8U9LP3810-7  [UDFN3810-9]  74.06 18.65 0 top
TVS8  NSPU3051N2T5G  [D-XDFN2]  81.56 14.9 90 top
TVS9  NSPU3051N2T5G  [D-XDFN2]  79.06 14.9 90 top
TVS10  NSPU3051N2T5G  [D-XDFN2]  66.06 5.4 180 top
TVS11  D3V3F8U9LP3810-7  [UDFN3810-9]  74.56 2.4 0 top
TVS13  NSPU3051N2T5G  [D-XDFN2]  50.66 44.4 0 top
TVS14  NSPU3051N2T5G  [D-XDFN2]  84.81 21.4 180 top
TVS15  NSPU3051N2T5G  [D-XDFN2]  84.81 23.4 180 top
TVS16  NSPU3051N2T5G  [D-XDFN2]  84.81 25.15 180 top
TVS17  NSPU3051N2T5G  [D-XDFN2]  82.06 21.4 180 top
TVS18  NSPU3051N2T5G  [D-XDFN2]  82.06 23.4 180 top
TVS19  NSPU3051N2T5G  [D-XDFN2]  82.06 25.15 180 top
TVS20  NSPU3051N2T5G  [D-XDFN2]  46.41 43.65 270 top
TVS21  NSPU3051N2T5G  [D-XDFN2]  47.66 43.65 270 top
TVS22  NSPU3051N2T5G  [D-XDFN2]  87.11 33.3 180 top
U1  TXS0104ERGYR  [VFQFN14-EXP-0350X0350]  11.81 26.4 90 top
U2  TXS0108ERGYR  [VFQFN20-EXP-0350X0450]  11.1 16.81 270 top
U3  TXS0104ERGYR  [VFQFN14-EXP-0350X0350]  43.4 8.01 0 top
U15  74LV4066PW  [TSSOP14]  38.56 19.4 90 top
U16  BME280  [IC-BME280]  34.31 49.15 0 top
U17  ADS7828E  [TSSOP16]  71.56 37.9 90 top
U18  CMM-2718AT-42316-TR  [LGA4-0275X0185]  57.31 24.15 90 top
U19  LTC1966IMS8  [MSOP8]  52.06 35.15 180 top
U20  MCP6022-I/SN  [SOIC8]  65.31 22.15 0 top
U21  MCP6022-I/SN  [SOIC8]  49.81 23.4 0 top
U22  MAX5805BAUB+T  [MSOP10]  35.31 36.15 0 top

## Library data of the parts
C9-C11 C15-C20 C27 C28 C99-C106 C108-C117 C123-C126 C128-C130 C132 C133 = CS-C-0402-100n/50V
C14 = CS-C-0402-1n/50V
C21-C26 C107 C134 = CS-C-0603-10u/10V-X5R
C121 C122 C127 C131 = CS-C-0402-1u/16-X5R
DS5 DS6 = SCHOTTKY-SS14 - 1A/40V
DZ3 DZ5 = ZENER - MMSZ5226BT1G - 3V3/0.5W
DZ4 DZ7 = ZENER - MMSZ5221BT1G - 2V4/0.5W
F2 F3 = PTC - 0ZCM0020FF2G - 0.2A/9V
FID1-FID3 = FIDUCIAL
J7 = HEADER-J-10x2-0200 - MDS
J9 J10 = STRIP-J-8-0254-FDT
J11 = FC - J-5X2-0200-FDS
J12 = GH - J-6-0125-MOS-SM06B-GHS-TB
J13 = ZH - J-5-0150-MOS-S5B-ZR-SM4A
L3 L5-L8 = FIL-BLM21PG221SN1D-220R/2A
Q11 Q24 Q26 = PMOS - BSS84 - 0.13A/50V
Q12 Q25 Q27 = NPN - BC817-25 - 0.5A/45V
Q28 = NMOS - BSS138 - 0.2A/50V
R18-R29 R32 R36 R39-R47 R50 R96 R97 R101 R102 R226 R231 = RS-0402-33r
R33 R34 R48 R49 = RS-0603-0r
R35 R38 R61 R62 R228 R243 R249 R286-R288 = RS-0402-0r
R37 R57 R232 R236 R239-R242 R244 R246 R270 R271 R276 R289 R290 = RS-0402-100k
R51 R234 R245 R282 = RS-0402-1k
R53 R54 R105 R225 R230 R280 = RS-0402-100r
R59 R60 R106 R233 R235 R237 R238 R247 R248 R250-R253 R256-R258 R263-R266 R272 R274 R277 R278 R281 R284 R285 = RS-0402-10k
R254 R255 R259-R262 = RS-0402-5.1k
R267 R268 = RS-0402-1M
R269 = RS-0603-390r
R273 R275 = RS-0402-120k
R283 = RS-0402-2.2k
TVS7 TVS11 = TVS-UNI8x - D3V3F8U9LP3810-7
TVS8-TVS10 TVS13-TVS22 = TVS-UNI-NSPU3051N2T5G -5.5V/USB
U1 U3 = LEVEL SHIFTER-4x - TXS0104ERGYR
U2 = LEVEL SHIFTER-8x - TXS0108ERGYR
U15 = ASW-4xSPST - 74LV4066PW
U16 = SEN-TEMP-PRS-HUM - BME280
U17 = ADC - ADS7828E - 12 BIT
U18 = SEN-MIC-CMM-2718AT-42316-TR
U19 = RMS-TO-DC - LTC1966
U20 U21 = OPAMP-2x - MCP6022-I/SN
U22 = DAC - MAX5805BAUB+T

## Footprints (pads in the part's own frame, mm; a bottom-side part is the same pattern mirrored in y, then rotated)
CS-C-0402
  rect 0.62x0.62 smd: 1(-0.45,0) 2(0.45,0)
CS-C-0603
  rect 1x0.8 smd: 1(-0.8,0) 2(0.8,0)
D-XDFN2
  rect 0.47x0.6 smd: 1(-0.365,0) 2(0.365,0)
FIDUCIAL
  round 1 smd: 1(0,0)
FS-0603
  rect 0.7x1 smd: 1(-0.85,0) 2(0.85,0)
IC-BME280
  rect 0.5x0.35 smd: 1(1.025,0.975) 2(1.025,0.325) 3(1.025,-0.325) 4(1.025,-0.975) 5(-1.025,-0.975) 6(-1.025,-0.325) 7(-1.025,0.325) 8(-1.025,0.975)
J-5-0150-MOS-S5B-ZR-SM4A
  rect 1.092x1.905 smd: (-4.95,2.35) (4.95,2.35)
  rect 0.711x3.2 smd: 1(3,-1.6) 2(1.5,-1.6) 3(0,-1.6) 4(-1.5,-1.6) 5(-3,-1.6)
J-5X2-0200-FDS-BF100
  round 0 hole 1.5 unplated: (-3,0) (3,0)
  rect 0.85x2.1 smd: 1(-4,-2.65) 2(-4,2.65) 3(-2,-2.65) 4(-2,2.65) 5(0,-2.65) 6(0,2.65) 7(2,-2.65) 8(2,2.65) 9(4,-2.65) 10(4,2.65)
J-6-0125-MOS-SM06B-GHS-TB
  rect 1x2.8 smd: (-1.85,-3.2) (8.1,-3.2)
  rect 0.6x1.7 smd: 1(0,0) 2(1.25,0) 3(2.5,0) 4(3.75,0) 5(5,0) 6(6.25,0)
J-8-0254-FDT
  rect 1.94x1.94 hole 1: 1(-8.89,0)
  round 1.94 hole 1: 2(-6.35,0) 3(-3.81,0) 4(-1.27,0) 5(1.27,0) 6(3.81,0) 7(6.35,0) 8(8.89,0)
J-10X2-0200-MDS-878322014
  rect 1x2.75 smd: 1(0,0) 2(0,4.25) 3(2,0) 4(2,4.25) 5(4,0) 6(4,4.25) 7(6,0) 8(6,4.25) 9(8,0) 10(8,4.25) 11(10,0) 12(10,4.25) 13(12,0) 14(12,4.25) 15(14,0) 16(14,4.25) 17(16,0) 18(16,4.25) 19(18,0) 20(18,4.25)
LGA4-0275X0185
  rect 0.56x0.54 smd: 1(0.505,0.965) 2(0.505,-0.965) 3(-0.505,-0.965) 4(-0.505,0.965)
LS-0805
  rect 0.9x1.4 smd: 1(-1.05,0) 2(1.05,0)
MSOP8
  rect 1.6x0.35 smd: 1(-2.3,1) 2(-2.3,0.35) 3(-2.3,-0.3) 4(-2.3,-0.95) 5(2.2,-0.95) 6(2.2,-0.3) 7(2.2,0.35) 8(2.2,1)
MSOP10
  rect 1.4x0.3 smd: 1(0,0) 2(0,-0.5) 3(0,-1) 4(0,-1.5) 5(0,-2) 6(4.4,-2) 7(4.4,-1.5) 8(4.4,-1) 9(4.4,-0.5) 10(4.4,0)
RS-0402
  rect 0.62x0.62 smd: 1(-0.45,0) 2(0.45,0)
RS-0603
  rect 1x0.8 smd: 1(-0.8,0) 2(0.8,0)
SMA
  rect 2x2.6 smd: 1(0,0) 2(4.5,0)
SOD123
  rect 1.2x1.7 smd: 1(0,0) 2(3.2,0)
SOIC8
  rect 0.635x2.003 smd: 1(0,0) 2(1.27,0) 3(2.54,0) 4(3.81,0) 5(3.81,5.486) 6(2.54,5.486) 7(1.27,5.486) 8(0,5.486)
SOT23
  rect 0.9x0.8 smd: 1(0,0) 2(0,1.9) 3(-2.37,0.95)
TSSOP14
  rect 0.35x1.55 smd: 1(0,0) 2(0.65,0) 3(1.3,0) 4(1.95,0) 5(2.6,0) 6(3.25,0) 7(3.9,0) 8(3.9,5.6) 9(3.25,5.6) 10(2.6,5.6) 11(1.95,5.6) 12(1.3,5.6) 13(0.65,5.6) 14(0,5.6)
TSSOP16
  rect 0.35x1.55 smd: 1(0,0) 2(0.65,0) 3(1.3,0) 4(1.95,0) 5(2.6,0) 6(3.25,0) 7(3.9,0) 8(4.55,0) 9(4.55,5.6) 10(3.9,5.6) 11(3.25,5.6) 12(2.6,5.6) 13(1.95,5.6) 14(1.3,5.6) 15(0.65,5.6) 16(0,5.6)
UDFN3810-9
  rect 0.305x0.508 smd: 1(-1.8,-0.4) 2(-0.9,-0.4) 3(0,-0.4) 4(0.9,-0.4) 5(1.8,-0.4) 6(1.35,0.4) 7(0.45,0.4) 8(-0.45,0.4) 9(-1.35,0.4)
unnamed#2
  round 0 hole 2.6 unplated: (0,0)
unnamed#3
  round 0 hole 3 unplated: (0,0)
VFQFN14-EXP-0350X0350
  rect 0.85x0.28 smd: 1(-1.725,-0.75) 7(1.725,-0.75) 8(1.725,0.75) 14(-1.725,0.75)
  rect 0.28x0.85 smd: 2(-1,-1.725) 3(-0.5,-1.725) 4(0,-1.725) 5(0.5,-1.725) 6(1,-1.725) 9(1,1.725) 10(0.5,1.725) 11(0,1.725) 12(-0.5,1.725) 13(-1,1.725)
  rect 2.05x2.05 smd: 15(0,0)
VFQFN20-EXP-0350X0450
  rect 0.25x0.6 smd: 1(-0.75,2.15) 10(-0.75,-2.15) 11(0.75,-2.15) 20(0.75,2.15)
  rect 0.6x0.25 smd: 2(-1.65,1.75) 3(-1.65,1.25) 4(-1.65,0.75) 5(-1.65,0.25) 6(-1.65,-0.25) 7(-1.65,-0.75) 8(-1.65,-1.25) 9(-1.65,-1.75) 12(1.65,-1.75) 13(1.65,-1.25) 14(1.65,-0.75) 15(1.65,-0.25) 16(1.65,0.25) 17(1.65,0.75) 18(1.65,1.25) 19(1.65,1.75)
  rect 1.7x2.7 smd: 21(0,0)

## Nets
3V3: C15.1 C17.1 C27.1 C99.1 L3.1 Q11.2(S) Q24.2(S) Q26.2(S) R37.2 R232.2 R239.2 R240.2 R244.2 U1.1 U2.2 U3.1 U15.14(VCC)
3V3#: C21.1 C22.1 C23.1 C102.1 C103.1 C117.1 C123.1 C126.1 C127.2 C130.1 C131.2 C133.1 C134.1 DS5.2 DZ4.1(C) DZ7.1(C) L5.1 R34.2 R61.1 R243.2 R248.2 R267.2 R270.2 R277.2 R285.2 R289.2 R290.2 U16.2 U16.6(VDDIO) U16.8 U18.1(VDD) U19.7 U20.8 U21.8 U22.1 U22.6(VDDIO) U22.7
3V3#_I2C_SCL: R290.1 U15.4 U16.4 U22.4
3V3#_I2C_SDA: R289.1 U15.8 U16.3 U22.5
3V3#_NOISE_AN: C132.1 R286.2 R288.2 U21.6 U21.7
3V3#_NOISE_INT: R280.2 U15.1 U21.1
5V: C24.1 C25.1 C26.1 C28.1 C105.1 C107.1 DS6.2 DZ3.1(C) DZ5.1(C) L6.2 L7.2 L8.1 R33.2 R62.1 R228.2 R241.2 R242.2 R250.2 R251.2 R263.2 R266.2 U3.14(VCCB) U17.16(VDD)
5V_I2C_SCL: J12.4 J13.3 R101.2 R241.1 TVS20.1(C) U17.14
5V_I2C_SDA: J12.3 J13.2 R102.2 R242.1 TVS21.1(C) U17.15
5V_PM: C106.1 J12.1 J13.1 L7.1 TVS13.1(C)
GND_ANALOG: C110.2 C112.2 C113.2 C114.2 C115.2 C116.2 R249.2 R264.1 R265.1 U17.11
GND_DIGITAL: C9.2 C10.2 C11.2 C14.1 C15.2 C16.2 C17.2 C18.2 C19.1 C20.2 C21.2 C22.2 C23.2 C24.2 C25.2 C26.2 C27.2 C28.2 C99.2 C100.1 C101.1 C102.2 C103.2 C104.2 C105.2 C106.2 C107.2 C117.2 C121.2 C123.2 C124.2 C125.2 C126.2 C127.1 C128.2 C129.2 C130.2 C131.1 C132.2 C133.2 C134.2 J7.1 J7.2 J7.19 J9.8 J10.8 J11.1 J12.2 J12.5 J13.4 J13.5 Q12.2(E) Q25.2(E) Q27.2(E) Q28.2(S) R57.2 R59.1 R60.1 R106.1 R233.1 R235.1 R236.2 R237.1 R238.1 R246.2 R247.1 R249.1 R252.1 R253.1 R268.1 R271.1 R278.1 R281.1 R284.1 TVS7.3 TVS8.2 TVS9.2 TVS10.2 TVS11.3 TVS13.2 TVS14.2 TVS15.2 TVS16.2 TVS17.2 TVS18.2 TVS19.2 TVS20.2 TVS21.2 TVS22.2 U1.7 U1.15 U2.11 U2.21 U3.7 U3.15 U15.7 U16.1 U16.7 U17.9 U18.2 U18.3 U19.1 U19.4(VSS) U19.6 U19.8 U20.4(VSS) U21.4(VSS) U22.8
EXP_3V3: C9.1 J7.20 L3.2 TVS7.6
EXP_3V3#: C10.1 J7.4 L5.2 TVS7.2
EXP_5: J7.5 R29.2 TVS11.2
EXP_5V: C11.1 J7.3 L6.1 TVS10.1(C)
EXP_6: J7.6 R28.1 TVS7.4
EXP_7: J7.7 R27.2 TVS11.4
EXP_8: J7.8 R26.1 TVS7.5(IO8)
EXP_9: J7.9 R25.2 TVS11.5(IO8)
EXP_10: J7.10 R24.1 TVS7.9
EXP_11: J7.11 R23.2 TVS11.9
EXP_12: J7.12 R22.1 TVS7.8
EXP_13: J7.13 R21.2 TVS11.8
EXP_14: J7.14 R20.1 TVS7.7
EXP_15: J7.15 R19.2 TVS11.7
EXP_17: J7.17 R18.2 TVS11.6
I2C_SCL: R27.1 R226.1 R239.1 U2.3 U3.3
I2C_SDA: R29.1 R231.1 R240.1 U2.4 U3.4
NOISE_AN: R97.2 R287.2 R288.1
NOISE_DC: C124.1 U19.5 U21.3 U21.5
NOISE_INT: R18.1 U15.2
NOISE_REF: R282.2 R283.1 U21.2
PT1000+: J11.10 R261.1 TVS17.1(C)
PT1000-: J11.9 R262.1 TVS14.1(C)
SENSOR1_AUX: J11.8 R255.1 TVS18.1(C)
SENSOR1_WE: J11.7 R254.1 TVS15.1(C)
SENSOR2_AUX: J11.6 R260.1 TVS19.1(C)
SENSOR2_WE: J11.5 R259.1 TVS16.1(C)
UBUS_AN: R35.1 R38.1 R96.2
UBUS_CS: R22.2 U2.1
UBUS_EN: Q11.3 R53.2 R54.2
UBUS_INT: R21.1 U1.5
UBUS_PWM: R19.1 U1.4
UBUS_RST: R20.2 U1.3
UBUS_RX: R23.1 U2.9
UBUS_SOCKET_3V3: F2.1 J9.7
UBUS_SOCKET_5V: F3.2 J10.7
UBUS_SOCKET_AN: J9.1 R35.2 R39.2
UBUS_SOCKET_CS: J9.3 R32.2
UBUS_SOCKET_INT: J10.2 R45.2
UBUS_SOCKET_MISO: J9.5 R46.2
UBUS_SOCKET_MOSI: J9.6 R44.2
UBUS_SOCKET_PWM: J10.1 R43.2
UBUS_SOCKET_RST: J9.2 R41.2
UBUS_SOCKET_RX: J10.3 R50.2
UBUS_SOCKET_SCK: J9.4 R42.2
UBUS_SOCKET_SCL: J10.5 R36.2
UBUS_SOCKET_SDA: J10.6 R40.2
UBUS_SOCKET_TX: J10.4 R47.2
UBUS_SPI_MISO: R26.2 U2.7
UBUS_SPI_MOSI: R28.2 U2.6
UBUS_SPI_SCK: R24.2 U2.5
UBUS_TX: R25.1 U2.8
UBUS_VCC: C16.1 C18.1 R33.1 R34.1 U1.14(VCCB) U2.19(VCCB)
N17127025: J7.18 R97.1 TVS8.1(C)
N17127061: J7.16 R96.1 TVS9.1(C)
N17130276: R32.1 U2.20
N17130475: R36.1 U2.18
N17130494: R38.2 U1.2
N17130496: R39.1 U1.13
N17130511: Q11.1 Q12.3 R37.1
N17130519: R40.1 U2.17
N17130538: R41.1 U1.12
N17130557: R42.1 U2.16
N17130576: R43.1 U1.11
N17130597: R44.1 U2.15
N17130612: R45.1 U1.10
N17130617: DZ4.2 R48.1
N17130619: DZ3.2 R49.1
N17130627: R46.1 U2.14
N17130666: R47.1 U2.13
N17130681: R48.2 R49.2 R51.2
N17130691: R50.1 U2.12
N17130702: R53.1 R60.2 U1.8
N17130727: C14.2 Q12.1 R51.1 R57.1
N17130761: R54.1 R59.2 U2.10
N17131062: C19.2 DS5.1(C) F2.2 R61.2
N17131066: C20.1 DS6.1(C) F3.1 R62.2
N17137206: R101.1 U3.12
N17137225: R102.1 U3.11
N17137251: R105.1 R106.2 U3.8
N17137276: Q24.3 R105.2
N17137867: DZ5.2 R228.1 R234.2
N17137883: Q24.1 Q25.3 R232.1
N17137906: C100.2 Q25.1 R234.1 R236.1
N17138447: R238.2 U3.5
N17138458: R237.2 U3.2
N17139891: Q26.3 R225.1 R230.1
N17139939: R225.2 R235.2 U15.12 U15.13
N17139998: R226.2 U15.3
N17140063: R230.2 R233.2 U15.5 U15.6
N17140099: R231.2 U15.9
N17140112: DZ7.2 R243.1 R245.2
N17140128: Q26.1 Q27.3 R244.1
N17140177: C101.2 Q27.1 R245.1 R246.1
N17141775: R247.2 R248.1 U16.5
N17142105: C104.1 J11.2 L8.2 TVS22.1(C)
N17149330: C108.2 C110.1 R254.2 R256.1 U17.1
N17149333: C108.1 C113.1 R255.2 R256.2 U17.2
N17149340: C109.2 C112.1 R257.1 R259.2 U17.3
N17149343: C109.1 C114.1 R257.2 R260.2 U17.4
N17149346: C111.2 C115.1 R258.1 R261.2 U17.5
N17149349: C111.1 C116.1 R258.2 R262.2 U17.6
N17149352: R263.1 R264.2 U17.7
N17149966: R250.1 R252.2 U17.12
N17149971: R251.1 R253.2 U17.13
N17154304: R265.2 R266.1 U17.8
N17164270: C122.1 U18.4
N17164273: C122.2 R267.1 R268.2 R269.1
N17164875: C121.1 R269.2 U20.3
N17165883: R276.2 U19.2
N17166969: C125.1 R270.1 R271.2 U19.3
N17168716: C128.1 R272.1
N17168719: R272.2 R273.1 U20.2
N17169015: R273.2 U20.1 U20.5
N17169365: C129.1 R274.1
N17169368: R274.2 R275.2 U20.6
N17169519: R275.1 R276.1 U20.7
N17173194: R277.1 R278.2 U22.3
N17174054: Q28.1 R280.1
N17174452: Q28.3 R281.2 R282.1
N17174956: R283.2 U22.9
N17176965: R284.2 R285.1 U22.2
N17180249: R286.1 U15.11
N17180321: R287.1 U15.10

Pads without a net: FID1 1; FID2 1; FID3 1; J11 3 4; J12 6; TVS7 1; TVS11 1; U1 6 9; U3 6 9 10 13; U17 10; U22 10

## Via types
v1: diameter 0.508, hole 0.305, TOP to BOTTOM, 107 vias
v2: diameter 0.711, hole 0.356, TOP to BOTTOM, 206 vias

## Routing (per net, layer and track width the routed paths; a pad name or vN(x,y) marks a point on that pad's centre or on a via; arc(x,y) is an arc through that point)
3V3: length 155.9
  TOP w0.25: U2.2 12.96,18.35
  TOP w0.4: U15.14 31.51,19.4 C99.1 31.01,18.85 v2(31.69,18.17) ; v2(49.76,13.04) Q24.2 50.29,11.47 R232.2 ; R240.2 42.89,3.14 R239.2 ; U3.1 41.67,7.25 v2(40.61,7.25) 39.77,7.25 C27.1 ; 12.96,18.35 14.71,18.35 C15.1 14.81,19 15.21,19.4 v2(15.61,19.4) ; v2(12.61,22.3) C17.1 12.61,24.62 U1.1 ; R37.2 16.76,27.95 16.21,28.5 15.91,28.5 15.26,29.15 Q11.2
  TOP w0.5: v2(40.16,17.4) 39.86,17.1 32.76,17.1 v2(31.69,18.17) ; R239.2 40.3,3.15 38.96,4.49 38.96,7.08 39.14,7.26 C27.1 ; v2(30.71,25.2) 30.71,28.15 27.26,31.6 21.61,31.6 20.16,30.15 20.16,28.6 19.51,27.95 R37.2 18.56,25 17.96,24.4 v2(15.21,24.4) ; L3.1 85.11,18.05 84.51,18.66 81.57,18.66 78.88,21.35 73.06,21.35 69.96,18.25 58.71,18.25 56.96,16.5 v2(56.96,13.05) ; R244.2 v2(45.46,21.65) 46.36,22.55 46.36,23.77 45.56,24.57 45.56,24.8 Q26.2
  BOTTOM w0.5: v2(40.61,7.25) 39.66,8.2 39.66,13 40.31,13.65 ; v2(15.61,19.4) 15.51,19.4 v2(12.61,22.3) 12.61,23.75 13.71,24.85 14.76,24.85 v2(15.21,24.4) ; 40.31,13.65 49.15,13.65 v2(49.76,13.04) 49.76,13.05 v2(56.96,13.05) ; 40.31,13.65 39.66,14.3 39.66,16.9 v2(40.16,17.4) 40.76,18 42.41,18 45.46,21.05 v2(45.46,21.65) ; v2(30.71,25.2) 30.71,19.15 v2(31.69,18.17)
3V3#: length 206
  TOP w0.25: 40.81,34.45 40.61,34.65 U22.7 ; U22.6 40.51,34.15 40.75,34.39 41.02,34.39 C133.1 ; U22.1 35.96,36.15 v2(36.56,36.75)
  TOP w0.4: 35.34,49.47 35.89,49.47 36.11,49.7 36.11,50.35 35.71,50.75 33.57,50.75 33.29,50.47 U16.8 32.81,50.12 32.59,49.9 32.59,48.9 ; U19.7 48.11,34.8 C123.1 v2(46.91,34.85) ; R289.2 R290.2 ; 55.31,20.7 55.81,21.2 R267.2 ; 61.91,31.8 64.91,31.8 65.26,31.45 C127.2 65.26,29.63 C126.1 65.31,29.56 U20.8 ; C134.1 42.46,34.1 C133.1 41.16,34.1 40.81,34.45 ; R248.2 32.61,40.95 v2(33.11,41.45) C102.1 C103.1 v2(32.11,43.9) ; U18.1 56.35,25.63 C117.1 ; 32.59,48.9 32.66,48.82 U16.6 ; 32.59,48.9 32.59,48.87 v2(31.96,48.25) ; L5.1 63.26,16.4 C21.1 C22.1 C23.1 ; C131.2 C130.1 U21.8
  TOP w0.5: R289.2 35.56,41.46 34.74,40.64 33.92,40.64 v2(33.11,41.45) ; v2(60.61,33.85) 60.61,35.31 59.57,36.35 R270.2 59.06,37.99 58.6,38.45 47.51,38.45 46.91,37.85 v2(46.91,34.85) 46.06,34 46.06,31.6 46.81,30.85 48.21,30.85 C131.2 ; 29.81,36.45 30.26,36.9 R285.2 v2(32.61,38.55) 34.76,38.55 v2(36.56,36.75) ; 29.81,36.45 24.86,41.4 DZ4.1 22.61,41.6 R34.2 ; 29.81,36.45 29.81,33.2 29.86,33.15 ; v2(21.76,30.25) 21.76,29.21 19.66,27.1 19.66,23.6 21.86,21.4 21.86,16.2 22.61,15.45 v2(22.61,7.4) ; 29.86,33.15 v2(21.76,33.15) ; 29.86,33.15 R277.2 ; 61.91,31.8 60.66,31.8 v2(60.61,31.75) 58.16,31.75 56.86,30.45 C117.1 ; U18.1 55.47,24.65 55.01,24.2 55.01,21 55.31,20.7 DZ7.1 55.31,17.6 v2(54.76,17.05) 50.81,17.05 50.31,17.55 R243.2 ; v2(18.56,7.4) 15.39,7.4 15.34,7.35 DS5.2 ; C134.1 v2(44.11,34.45)
  BOTTOM w0.4: v2(31.96,48.25) 33.36,48.25 34.06,47.55 34.06,44.45 33.51,43.9 v2(32.11,43.9)
  BOTTOM w0.5: v2(46.91,34.85) 46.51,34.45 v2(44.11,34.45) 41.81,36.75 v2(36.56,36.75) ; v2(21.76,30.25) v2(21.76,33.15) ; v2(18.56,7.4) v2(22.61,7.4) ; v2(59.86,17) 54.81,17 v2(54.76,17.05) ; v2(60.61,33.85) v2(60.61,31.75) ; v2(33.11,41.45) 32.61,40.95 v2(32.61,38.55)
3V3#_I2C_SCL: length 38.1
  TOP w0.2: U15.4 36.73,21.35 31.56,26.51 31.56,31.95 32.15,32.54 33.95,32.54 34.21,32.8 34.21,34.4 34.46,34.65 U22.4 36.16,34.65 36.41,34.9 36.41,35.45 38.29,37.32 38.29,43.57 37.76,44.1 R290.1 36.87,44.29 36.87,44.33 36.19,45 35.36,45 34.91,45.45 34.91,47.8 35.29,48.17 U16.4
3V3#_I2C_SDA: length 35.1
  TOP w0.2: v1(38.71,44.1) 38.71,37.15 36.96,35.4 36.96,34.5 36.61,34.15 U22.5 34.86,34.15 34.61,33.9 34.61,32.55 34.2,32.14 32.4,32.14 31.96,31.7 31.96,26.9 v1(32.96,25.9) ; v1(32.96,24.15) U15.8 ; U16.3 34.79,48.82 34.51,48.55 34.51,45.15 R289.1 v1(36.25,44.1)
  BOTTOM w0.2: v1(32.96,25.9) v1(32.96,24.15) ; v1(38.71,44.1) v1(36.25,44.1)
3V3#_NOISE_AN: length 38.1
  TOP w0.2: U21.6 52.35,30.91 C132.1 51.36,30.95 51.06,30.65 51.06,28.9 U21.7 v1(51.08,27.05) ; R286.2 29.11,21.4 R288.2 27.61,21.7 27.21,22.1 27.21,23.4 v1(27.56,23.75)
  BOTTOM w0.2: v1(27.56,23.75) 27.56,25.05 30.01,27.5 49.41,27.5 49.86,27.05 v1(51.08,27.05)
3V3#_NOISE_INT: length 21.3
  TOP w0.2: v1(40.01,25.6) 40.66,26.25 40.91,26.25 41.26,26.6 R280.2 44.31,27.65 46.11,25.85 46.11,24.8 47.51,23.4 U21.1 ; U15.1 v1(40.01,19.4)
  BOTTOM w0.2: v1(40.01,19.4) v1(40.01,25.6)
5V: length 227
  TOP w0.4: DS6.2 37.46,6.28 37.46,8.3 ; 51.9,0.8 49.13,0.8 ; R266.2 R263.2 69.4,45.44 69.4,46.6 69,47 67,47 66.6,46.6 66.6,43.8 69.05,41.35 69.05,39.95 68.7,39.6 v2(67.9,39.6) ; C28.1 39.77,8.76 41.67,8.76 U3.14 ; C105.1 64.61,37.2 65.31,37.9 U17.16
  TOP w0.5: L8.1 85.36,30.62 83.89,29.15 75.96,29.15 ; v2(37.8,13.91) R241.2 41.66,13.93 41.66,15.4 42.21,15.95 44.26,15.95 44.63,15.58 R242.2 48.4,13.94 49.66,15.2 55.81,15.2 ; 61.32,40.4 61.31,40.4 60.76,39.84 ; 61.32,40.4 v2(61.31,40.41) 60.76,39.86 60.76,39.84 ; 61.32,40.4 R250.2 R251.2 ; 37.92,8.76 C28.1 ; 37.92,8.76 37.43,8.27 DS6.2 ; 37.92,8.76 37.8,8.88 v2(37.8,9.61) ; 55.81,2.35 55.81,15.2 ; 55.81,2.35 C26.1 C25.1 C24.1 64.46,2.35 L6.2 ; 55.81,2.35 54.26,0.8 51.9,0.8 ; 55.81,15.2 55.81,16.5 58.31,19 69.56,19 71.71,21.15 71.71,24.9 75.96,29.15 ; 68.7,33.5 68.7,34.55 68.87,34.71 68.87,37.9 67.9,38.87 v2(67.9,39.6) ; 68.7,33.5 64.66,33.5 64.26,33.9 C107.1 ; 68.7,33.5 71.61,33.5 75.96,29.15 ; C105.1 64.26,36.05 C107.1 ; v2(47.75,41.65) 47.75,40.4 48.25,39.9 51.35,39.9 51.7,40.25 51.7,41.39 L7.2 51.76,41.35 v2(52.85,41.35) ; R33.2 18.86,41.4 DZ3.1 16.81,45.2 17.66,46.05 22.56,46.05 29.26,39.35 35.87,39.35 v2(37.11,40.6) ; 60.76,39.84 60.46,39.55 60.46,36.45 61.76,35.15 C107.1 ; R228.2 48.58,3.91 47.87,3.21 DZ5.1 49.13,0.8
  BOTTOM w0.5: v2(67.9,39.6) 67.05,39.6 66.24,40.41 v2(61.31,40.41) 61.31,40.51 60.74,41.07 60.33,41.07 60,41.4 53.71,41.4 53.66,41.35 v2(52.85,41.35) ; v2(37.8,13.91) v2(37.8,9.61) ; v2(37.11,40.6) 39.31,40.6 40.16,41.45 47.55,41.45 v2(47.75,41.65)
